# Altium PCB AltiumPCB.PcbDoc
Units mm, origin at the board's own origin, x right, y up, seen from the top; angles counter-clockwise.
Board outline 99 x 80 mm, 4 copper layers (Top Layer, Layer 1, Layer 2, Bottom Layer), stack 0.603 mm thick; 52 components, 31 nets, 184 pads, 0 vias.
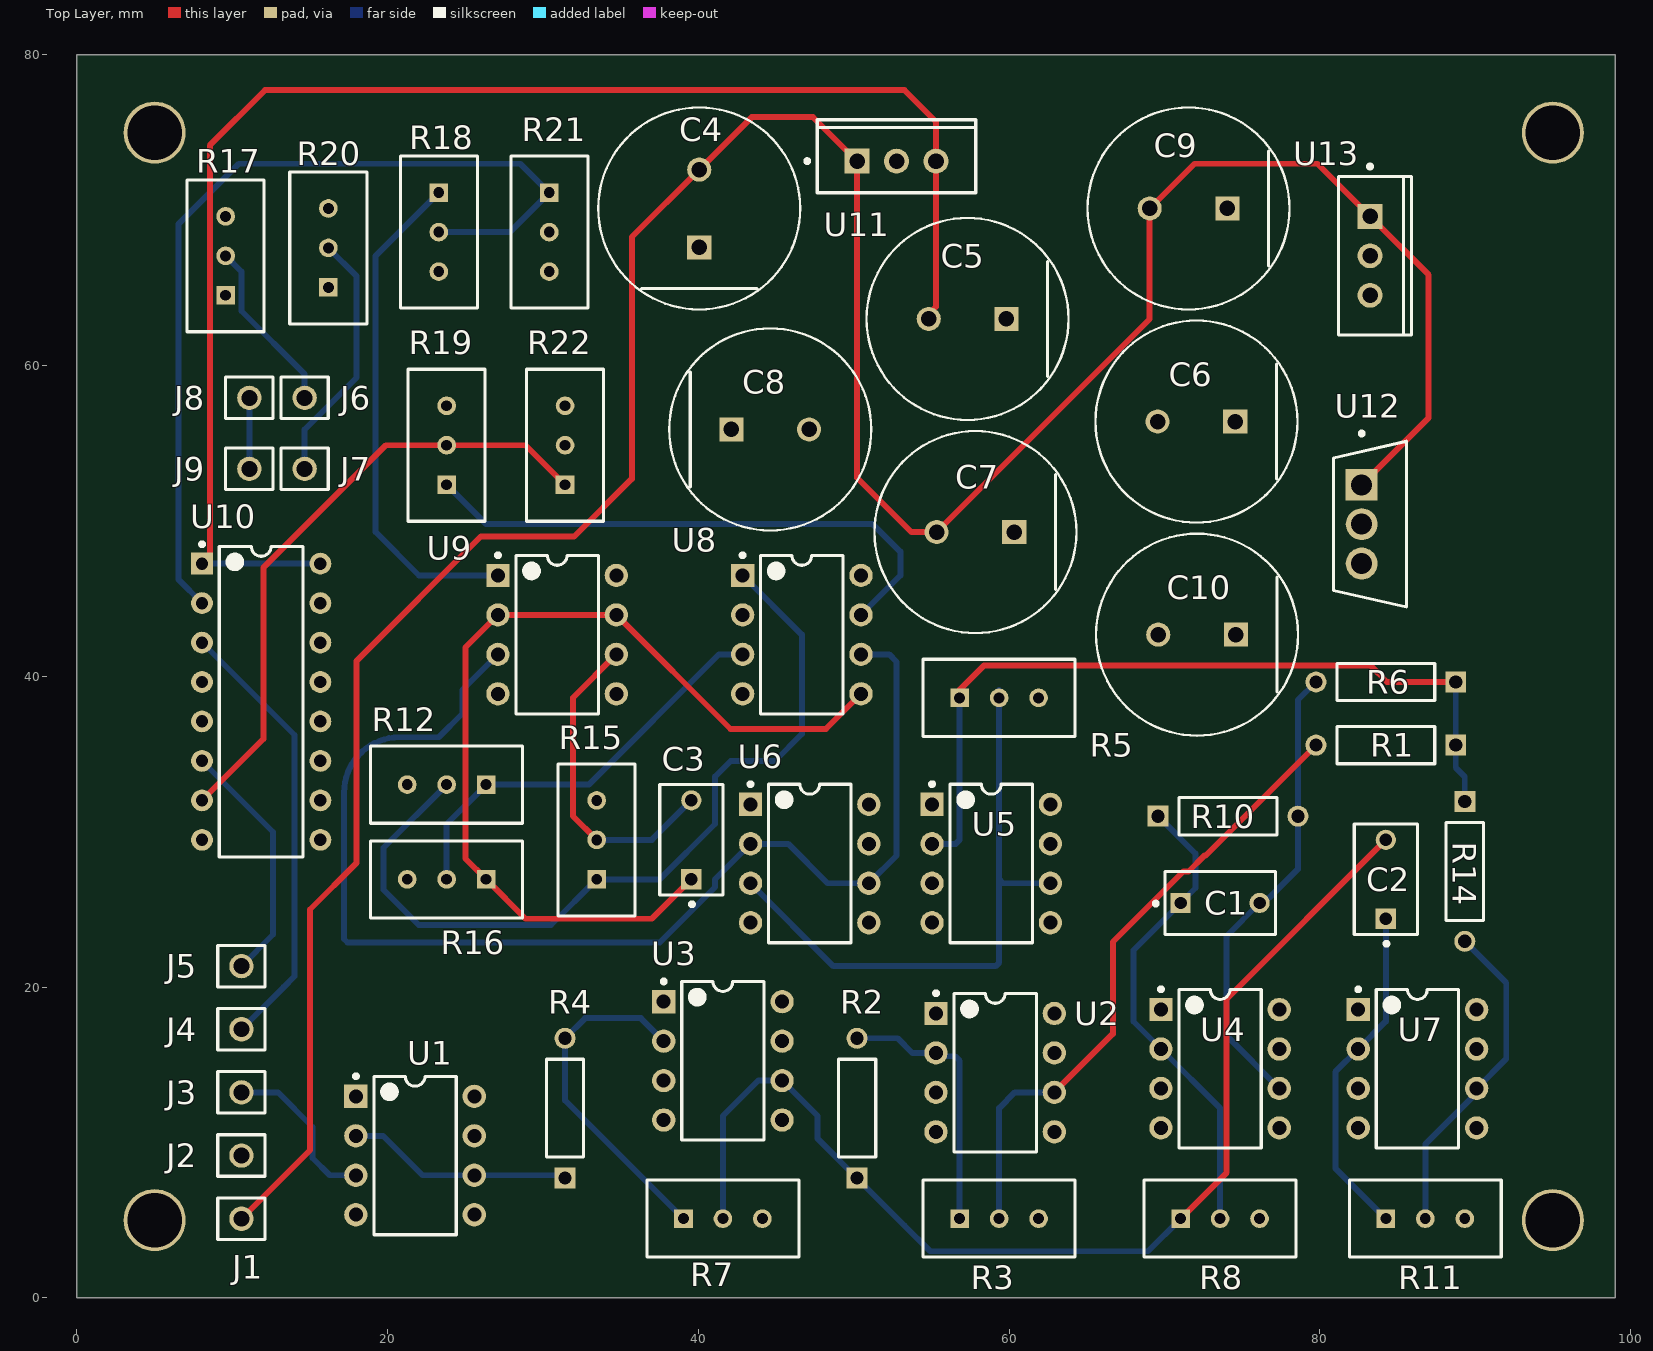
[diagram p0: Top Layer view]
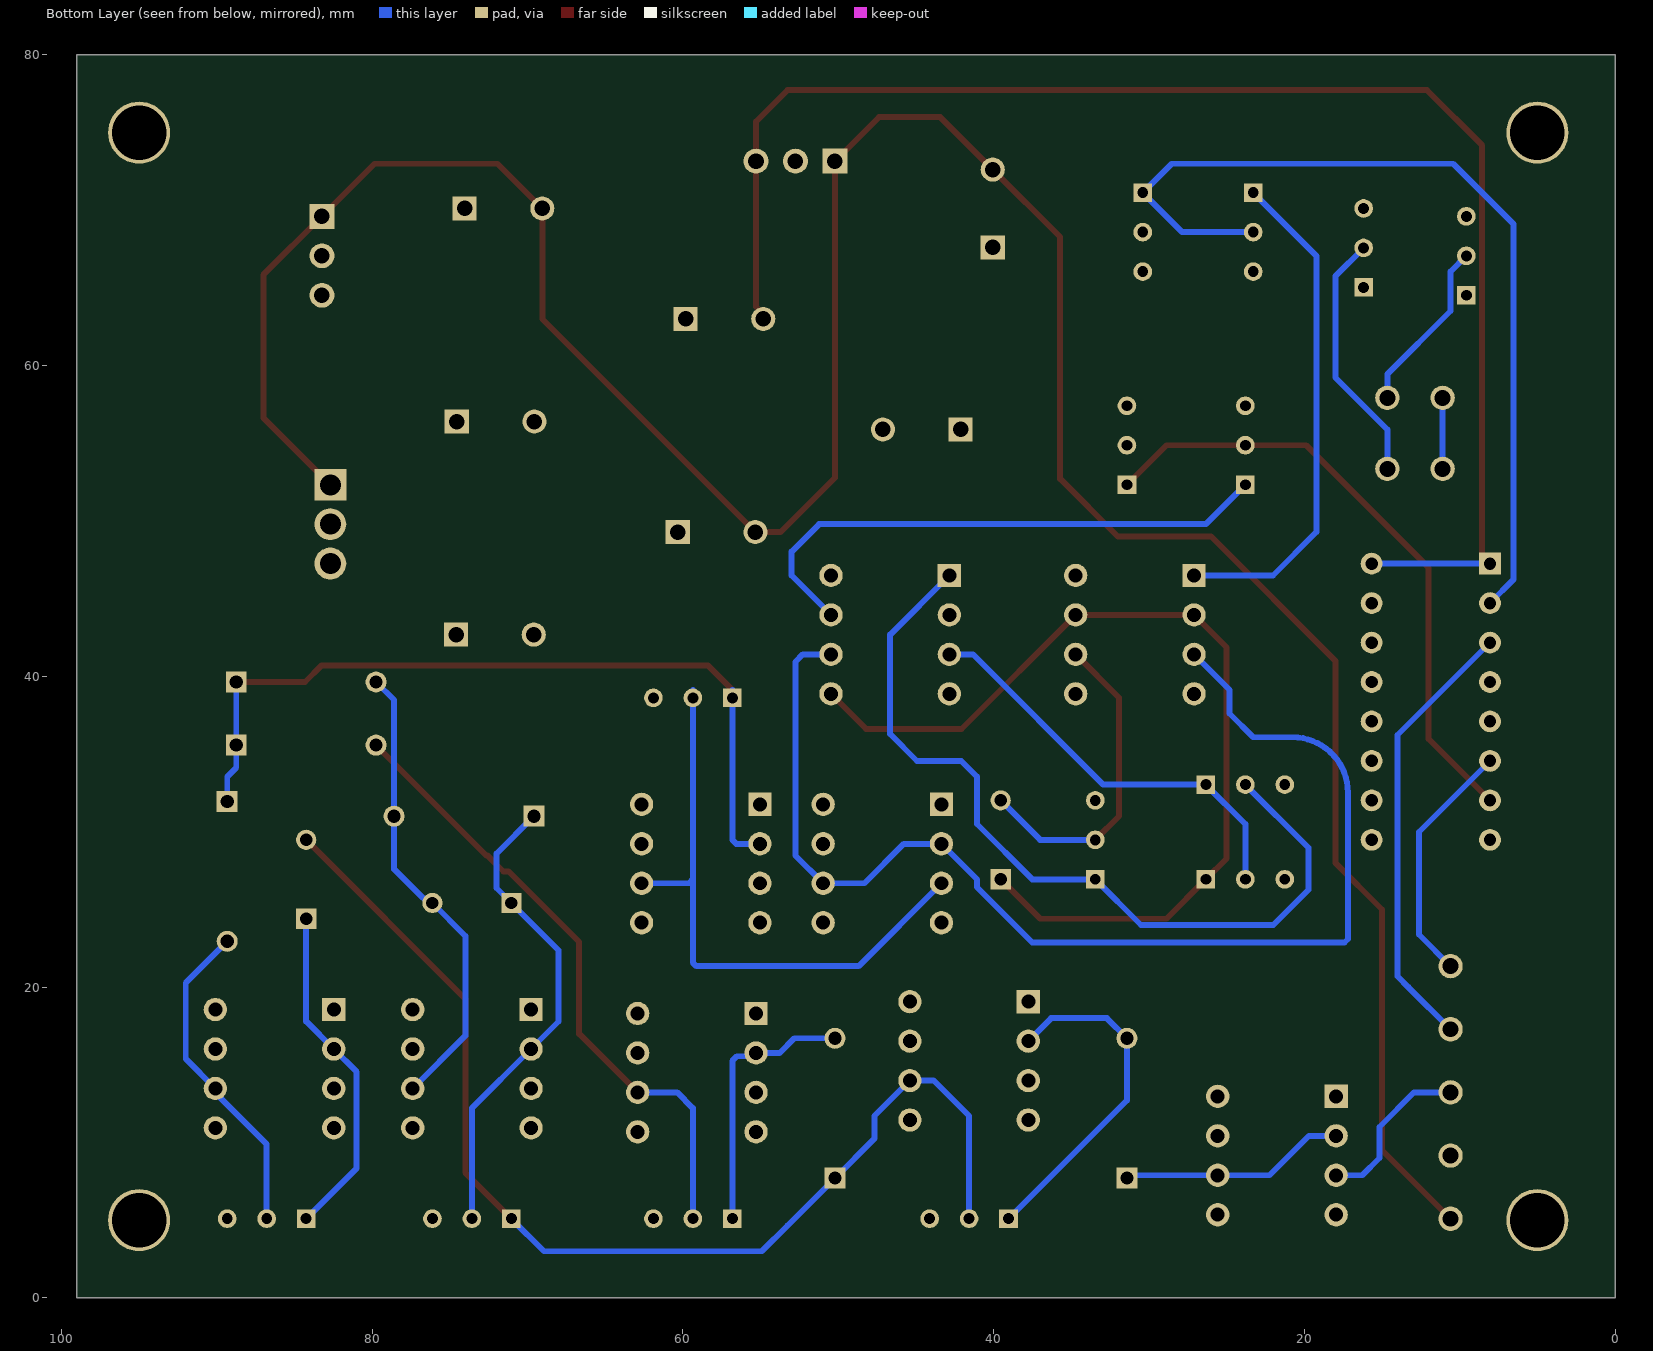
[diagram p1: Bottom Layer view, seen from below]
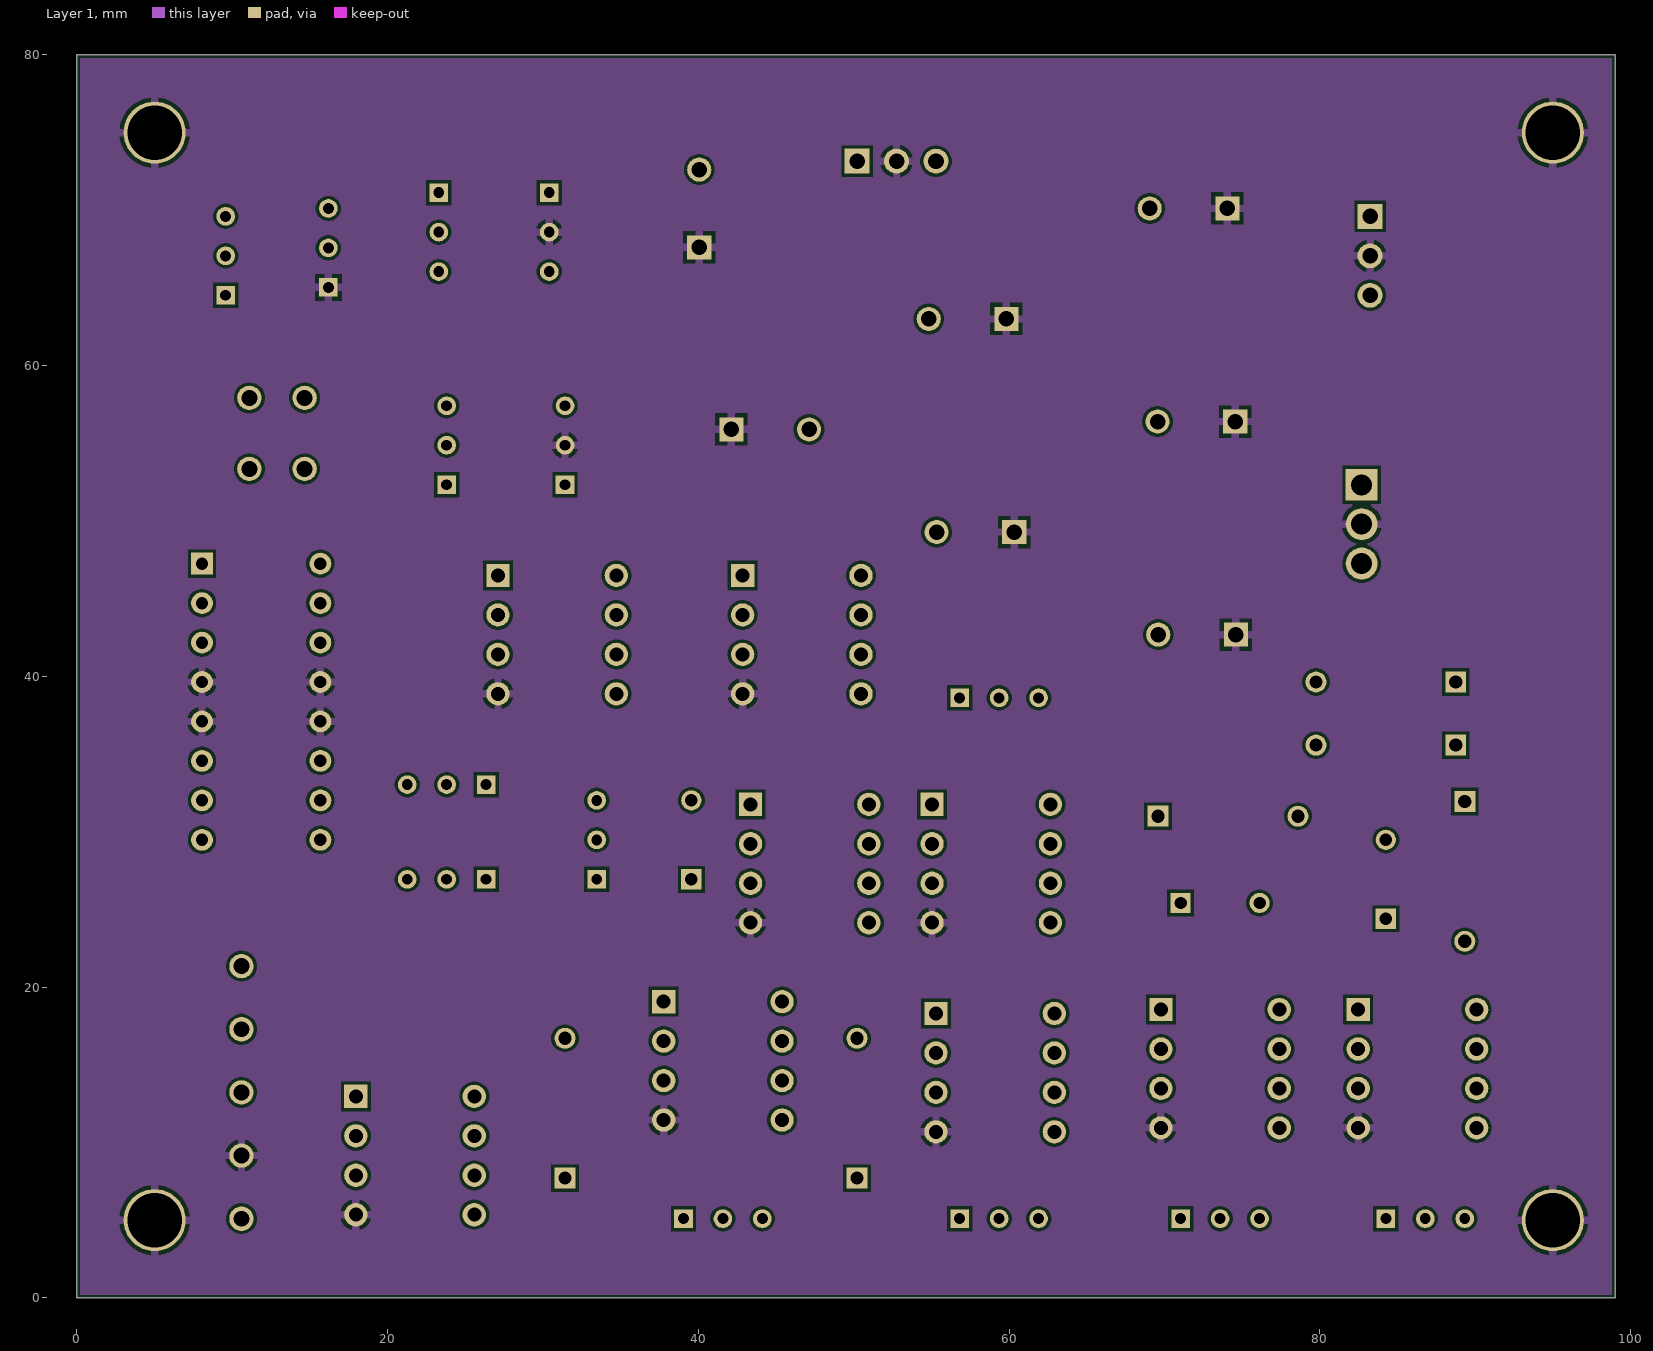
[diagram p2: Layer 1]
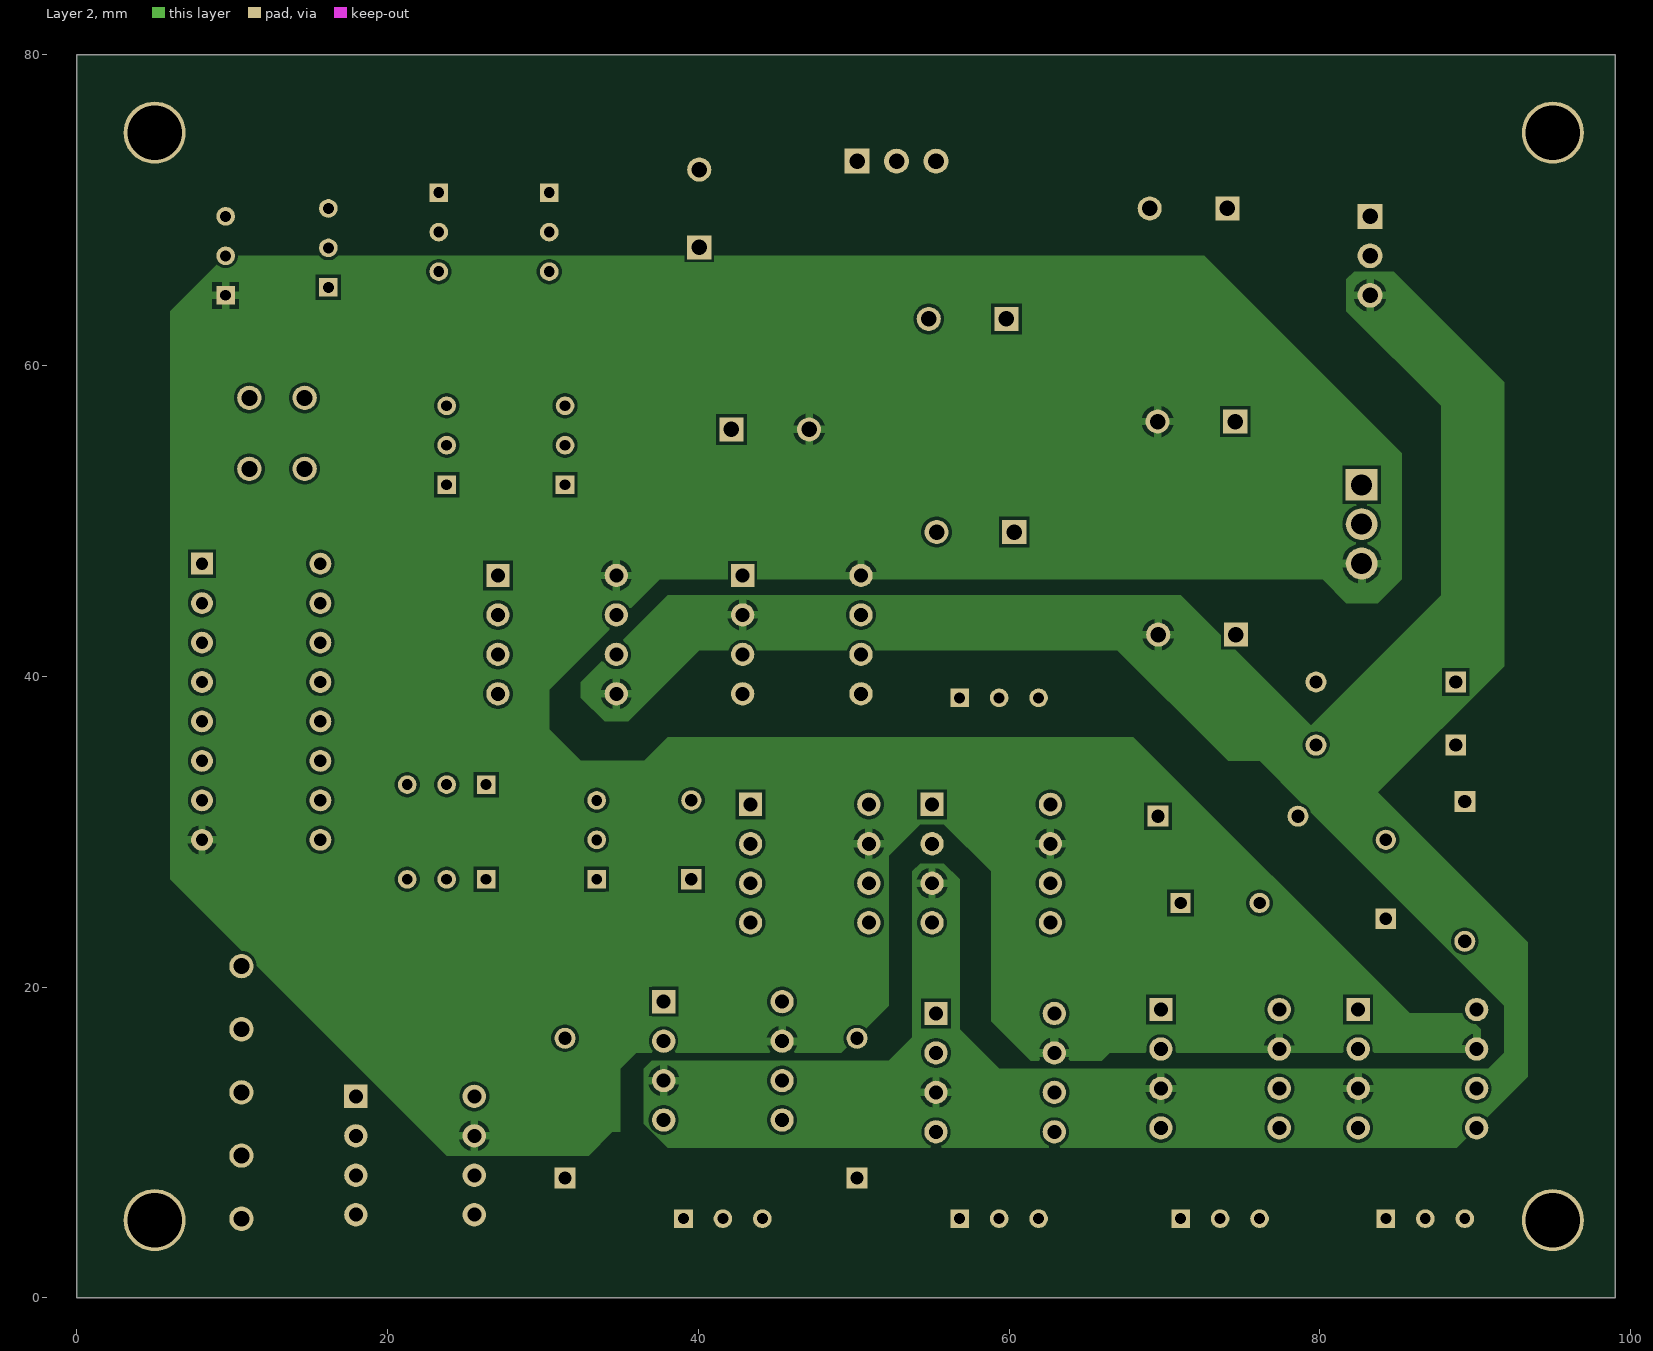
[diagram p3: Layer 2]
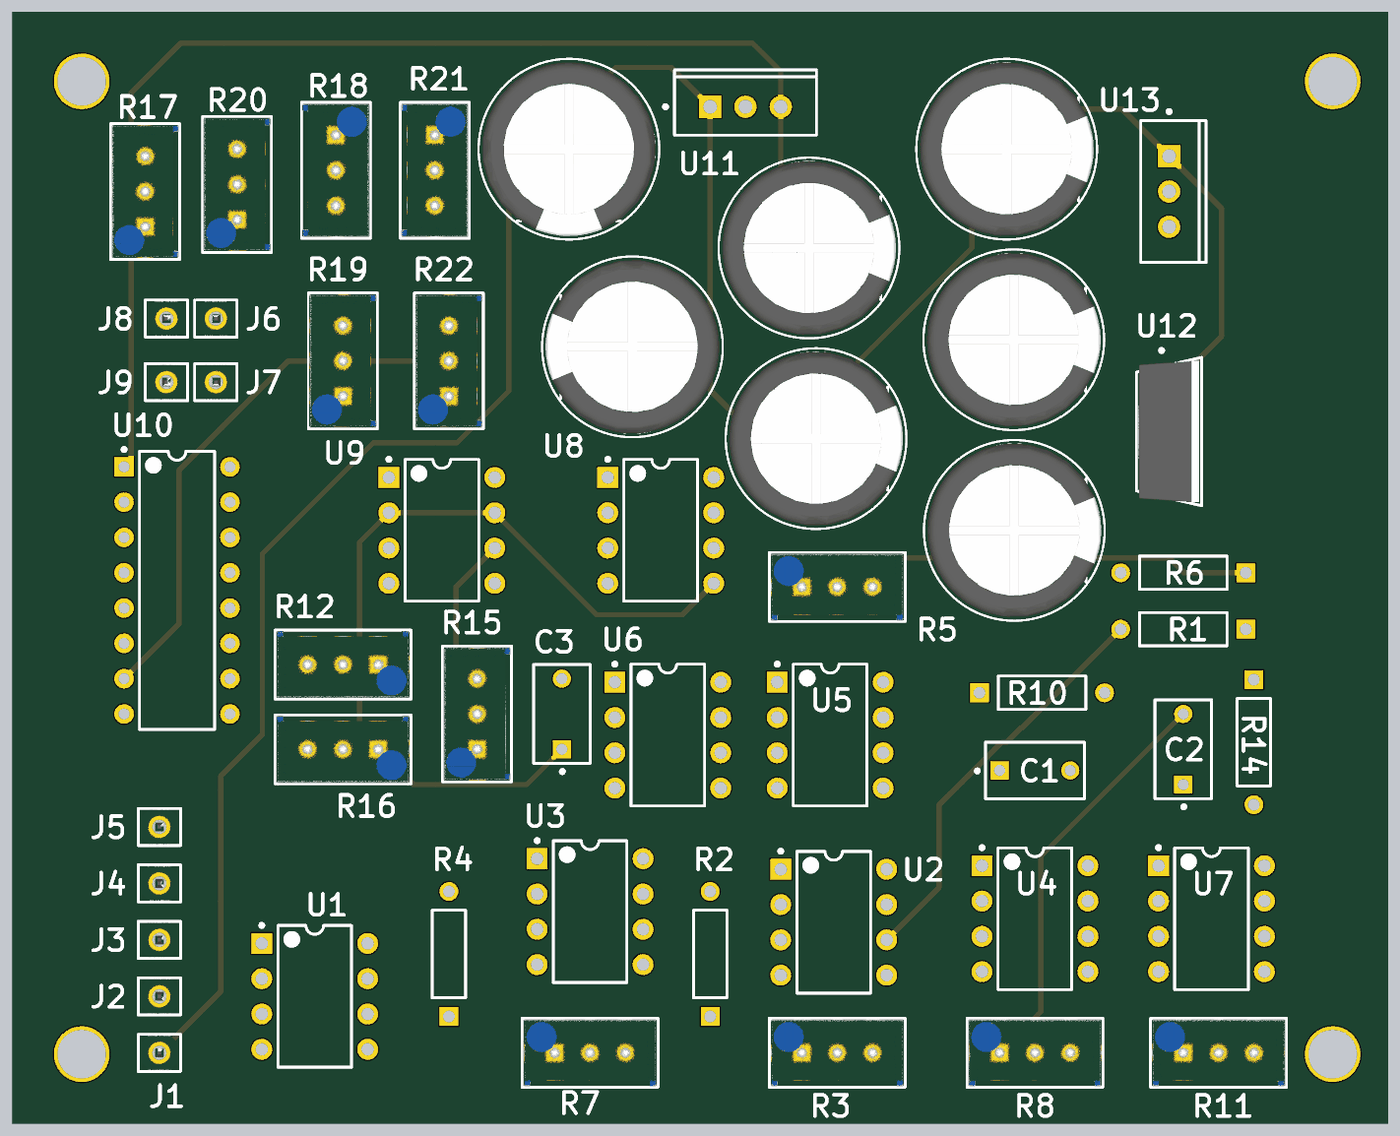
[diagram p4: 3D render of the assembled board from above, using the file's embedded part models]

## Layer stack, top to bottom
Top Solder: solder mask 0.0102, Solder Resist, Dk 3.5
Top Layer: signal copper 0.0356
Dielectric 2: prepreg 0.0711, PP-006, Dk 4.1
Layer 1: signal copper 0.035
Dielectric 1: dielectric 0.32, FR-4, Dk 4.8
Layer 2: signal copper 0.035
Dielectric 3: prepreg 0.0711, PP-006, Dk 4.1
Bottom Layer: signal copper 0.0356
Bottom Solder: solder mask 0.0102, Solder Resist, Dk 3.5

## Board outline
0,0 99,0 99,80 0,80

## Design rules (kind name [scope] priority, off if disabled: settings)
BoardOutlineClearance [All] p1: gap=0.2 ignorepadtopadclearanceinfootprint=FALSE except(0.4: Arc-SplitBarrior Arc-SplitContinuation Track-SplitBarrior Track-SplitContinuation SMDPad-SplitBarrior SMDPad-SplitContinuation THPad-SplitBarrior THPad-SplitContinuation Via-SplitBarrior Via-SplitContinuation Fill-SplitBarrior Fill-SplitContinuation Poly-SplitBarrior Poly-SplitContinuation Region-SplitBarrior Region-SplitContinuation Text-SplitBarrior Text-SplitContinuation)
Clearance "Clearance Bottom Layer" [OnLayer('Bottom Layer')] p1: gap=0.203 ignorepadtopadclearanceinfootprint=TRUE except(0.254: Arc-Text Track-Text SMDPad-Text THPad-Text Via-Text Fill-Text Poly-Text Region-Text Text-Text)
Clearance "Clearance Top Layer" [OnLayer('Top Layer')] p2: gap=0.203 ignorepadtopadclearanceinfootprint=TRUE except(0.254: Arc-Text Track-Text SMDPad-Text THPad-Text Via-Text Fill-Text Poly-Text Region-Text Text-Text)
Clearance [All] p3: gap=0.2 ignorepadtopadclearanceinfootprint=FALSE except(0.089: Arc-Arc Arc-Track Arc-SMDPad Track-Track Track-SMDPad SMDPad-SMDPad; 0.127: Arc-Via Track-Via SMDPad-Via THPad-Via Via-Via; 0.254: Arc-Text Track-Text SMDPad-Text THPad-Text Via-Text Fill-Text Poly-Text Region-Text Text-Text)
HoleSize [All] p1: absolutevalues=TRUE maxlimit=6.3 minlimit=0.2 maxpercent=80.000 minpercent=20.000
MinimumAnnularRing [All] p1: minimumring=0.076
MinimumSolderMaskSliver [All] p1: minsoldermaskwidth=0.1
PolygonConnect PolygonConnect_1 [All] p1: thpad.connectstyle=Relief thpad.reliefconductorwidth=0.508 thpad.reliefentries=4 thpad.polygonreliefangle="90 Angle" thpad.airgapwidth=0.254 smdpad.connectstyle=Relief smdpad.reliefconductorwidth=0.508 smdpad.reliefentries=4 smdpad.polygonreliefangle="90 Angle" smdpad.airgapwidth=0.254 via.connectstyle=Direct via.reliefconductorwidth=0.508 via.reliefentries=4 via.polygonreliefangle="90 Angle" via.airgapwidth=0.254
RoutingCorners [All] p1: cornerstyle=Round minsetback=2.54 maxsetback=2.54
RoutingVias [All] p1: holewidth=0.5 width=1 viastyle="Through Hole" minholewidth=0.2 minwidth=0.45 maxholewidth=1 maxwidth=2
SilkToSilkClearance [All] p1: silktosilkclearance=0.1
SilkToSolderMaskClearance [IsPad] p1: minsilkscreentomaskgap=0.1 clearancetoexposedcopper=TRUE
SolderMaskExpansion [All] p1: expansion=0.102 istentingtop=FALSE
Width [All] p1: maxlimit=2.54 minlimit=0.089 preferedwidth=0.381
25 further rules are at their usual default settings.

## Components (designator, comment, footprint, x,y, rotation, side; value= is the part's Value field where it differs from the comment)
C1 "C330C105M5U5TA" KEMT-C330C105M5U5TA 73.58,25.416 r0 top
C2 "C330C105M5U5TA" KEMT-C330C105M5U5TA 84.248,26.94 r90 top
C3 "C330C105M5U5TA" KEMT-C330C105M5U5TA 39.544,29.48 r90 top
C4 "EEUFK1C472L" FP-RAD-TH-D_12_5_0_5-L_40-MFG 40.052,70.12 r90 top
C5 "EEUFK1C472L" FP-RAD-TH-D_12_5_0_5-L_40-MFG 57.324,63.008 r180 top
C6 "EEUFK1C472L" FP-RAD-TH-D_12_5_0_5-L_40-MFG 72.056,56.404 r180 top
C7 "EEUFK1C472L" FP-RAD-TH-D_12_5_0_5-L_40-MFG 57.832,49.292 r180 top
C8 "EEUFK1C472L" FP-RAD-TH-D_12_5_0_5-L_40-MFG 44.624,55.896 r0 top
C9 "EEUFK1C472L" FP-RAD-TH-D_12_5_0_5-L_40-MFG 71.548,70.12 r180 top
C10 "EEUFK1C472L" FP-RAD-TH-D_12_5_0_5-L_40-MFG 72.096,42.688 r180 top
J1 "PBC01SAAN" FP-PBC01SAAN-MFG 10.588,5.096 r0 top
J2 "PBC01SAAN" FP-PBC01SAAN-MFG 10.588,9.16 r0 top
J3 "PBC01SAAN" FP-PBC01SAAN-MFG 10.588,13.224 r0 top
J4 "PBC01SAAN" FP-PBC01SAAN-MFG 10.588,17.288 r0 top
J5 "PBC01SAAN" FP-PBC01SAAN-MFG 10.588,21.352 r0 top
J6 "PBC01SAAN" FP-PBC01SAAN-MFG 14.652,57.928 r0 top
J7 "PBC01SAAN" FP-PBC01SAAN-MFG 14.652,53.356 r0 top
J8 "PBC01SAAN" FP-PBC01SAAN-MFG 11.096,57.928 r0 top
J9 "PBC01SAAN" FP-PBC01SAAN-MFG 11.096,53.356 r0 top
R1 "MFR-25FBF52-47K5" RESA60-630X240 84.248,35.576 r180 top
R2 "MFR-25FBF52-47K5" RESA60-630X240 50.212,12.208 r90 top
R3 "3296W-1-501LF" FP-3296W-MFG 59.356,5.101 r270 top
R4 "MFR-25FBF52-47K5" RESA60-630X240 31.416,12.208 r90 top
R5 "3296W-1-501LF" FP-3296W-MFG 59.356,38.624 r270 top
R6 "MFR-25FBF52-47K5" RESA60-630X240 84.248,39.64 r180 top
R7 "3296W-1-501LF" FP-3296W-MFG 41.576,5.101 r270 top
R8 "3296W-1-501LF" FP-3296W-MFG 73.58,5.101 r270 top
R10 "MFR-25FBF52-47K5" RESA60-630X240 74.088,31.004 r0 top
R11 "3296W-1-501LF" FP-3296W-MFG 86.788,5.101 r270 top
R12 "3296W-1-501LF" FP-3296W-MFG 23.796,33.031 r90 top
R14 "MFR-25FBF52-47K5" RESA60-630X240 89.328,27.448 r270 top
R15 "3296W-1-501LF" FP-3296W-MFG 33.448,29.48 r0 top
R16 "3296W-1-501LF" FP-3296W-MFG 23.796,26.935 r90 top
R17 "3296W-1-501LF" FP-3296W-MFG 9.567,67.072 r0 top
R18 "3296W-1-501LF" FP-3296W-MFG 23.293,68.596 r180 top
R19 "3296W-1-501LF" FP-3296W-MFG 23.791,54.88 r0 top
R20 "3296W-1-501LF" FP-3296W-MFG 16.176,67.58 r0 top
R21 "3296W-1-501LF" FP-3296W-MFG 30.405,68.596 r180 top
R22 "3296W-1-501LF" FP-3296W-MFG 31.411,54.88 r0 top
U1 "UA741CP" P0008A 21.764,9.16 r0 top
U2 "UA741CP" P0008A 59.102,14.494 r0 top
U3 "UA741CP" P0008A 41.576,15.256 r0 top
U4 "UA741CP" P0008A 73.58,14.748 r0 top
U5 "UA741CP" P0008A 58.848,27.956 r0 top
U6 "UA741CP" P0008A 47.164,27.956 r0 top
U7 "UA741CP" P0008A 86.28,14.748 r0 top
U8 "TL072CP" P0008A 46.656,42.688 r0 top
U9 "TL072CP" P0008A 30.908,42.688 r0 top
U10 "L293D" STM-L293D-16 11.858,38.37 r0 top
U11 "LM7805CT" FAIR-TO-220-3 52.752,73.168 r90 top
U12 "LM7812CT" FP-TO220B03-MFG 83.232,49.8 r0 top
U13 "LM7805CT" FAIR-TO-220-3 83.232,67.072 r0 top

## Footprints (in the part's own frame and the unit in brackets; to place one, negate y for a bottom-side part, rotate by r counter-clockwise, add the part's x,y. Pads: shape width x height; smd on the part's side, far side on the other; paste and mask are expansions set on the pad)
FAIR-TO-220-3 [mm] "FM, 3-Leads, Body 10.2x4.7mm, Pitch 2.54mm"
  rect 1.6x1.6 hole 1: 1(0,2.54)
  round 1.6 hole 1: 2(0,0) 3(0,-2.54)
  silkscreen extent -2.04,-5.1 2.66,5.87, body extent -2.04,-5.1 2.66,5.1, height 18.95
FP-3296W-MFG [mm]
  rect 1.2x1.2 hole 0.7 paste-1000 mask+0: 1(0.005,-2.54)
  round 1.2 hole 0.7 paste-1000 mask+0: 2(0.005,0) 3(0.005,2.54)
  silkscreen extent -2.48,-4.89 2.48,4.89, body extent -2.58,-4.99 2.58,4.99, height 0.25
FP-PBC01SAAN-MFG [mm]
  round 1.57 hole 1.02 paste-1000 mask+0: 1(0,0)
  silkscreen extent -1.53,-1.34 1.53,1.34, body extent -1.63,-1.44 1.63,1.44, height 0.25
FP-RAD-TH-D_12_5_0_5-L_40-MFG [mm]
  rect 1.55x1.55 hole 1 paste-1000 mask+0: 1(-2.5,0)
  round 1.55 hole 1 paste-1000 mask+0: 2(2.5,0)
  silkscreen extent -6.5,-6.5 6.5,6.5, body extent -6.6,-6.6 6.6,6.6, height 0.25
FP-TO220B03-MFG [mm]
  rect 2.05x2.05 hole 1.35 paste-1000 mask+0: 1(-0.54,2.535)
  round 2.05 hole 1.35 paste-1000 mask+0: 2(-0.54,0) 3(-0.54,-2.535)
  silkscreen extent -2.35,-5.34 2.35,5.96, body extent -2.45,-5.44 2.45,5.44, height 0.25
KEMT-C330C105M5U5TA [mm] "THD, 2-Leads, Body 7.11x4.07mm"
  rect 1.3x1.3 hole 0.8: 1(-2.54,0)
  round 1.3 hole 0.8: 2(2.54,0)
  silkscreen extent -4.27,-2.03 3.55,2.03, body extent -3.55,-2.03 3.55,2.03, height 9.14
P0008A [mm] "DIP, 8-Leads, Body 10.15x6.6mm, Pitch 2.54mm"
  rect 1.5x1.5 hole 0.9: 1(-3.81,3.81)
  round 1.5 hole 0.9: 2(-3.81,1.27) 3(-3.81,-1.27) 4(-3.81,-3.81) 5(3.81,-3.81) 6(3.81,-1.27) 7(3.81,1.27) 8(3.81,3.81)
  silkscreen extent -3.93,-5.1 2.65,5.23, body extent -3.95,-5.07 3.95,5.07, height 5.08
RESA60-630X240 [mm] "Axial Resistor, 2-Leads, Dia 2.4mm, Body Length 6.3mm"
  rect 1.35x1.35 hole 0.85: 1(-4.5,0)
  round 1.35 hole 0.85: 2(4.5,0)
  silkscreen extent -3.15,-1.2 3.15,1.2, body extent -3.15,-1.2 3.15,1.2, height 2.4
STM-L293D-16 [mm] "DIP, 16-Leads, Body 20x6.85mm, Pitch 2.54mm"
  rect 1.4x1.4 hole 0.8: 1(-3.81,8.89)
  round 1.4 hole 0.8: 2(-3.81,6.35) 3(-3.81,3.81) 4(-3.81,1.27) 5(-3.81,-1.27) 6(-3.81,-3.81) 7(-3.81,-6.35) 8(-3.81,-8.89) 9(3.81,-8.89) 10(3.81,-6.35) 11(3.81,-3.81) 12(3.81,-1.27) 13(3.81,1.27) 14(3.81,3.81) 15(3.81,6.35) 16(3.81,8.89)
  silkscreen extent -3.93,-10 2.7,10.26, body extent -3.93,-10 3.93,10, height 5.1

## Part data
C1 C2 C3: library part CMP-2000-06056-1, "Ceramic Capacitor, 1 uF, +/- 20%, 50 V, -10 to 85 degC, 2-Pin THD, RoHS, Bulk", Capacitance=1µF, Manufacturer=Kemet, Operating Temperature=10°C~85°C, Package / Case=Radial, Package Description="2-Pin Through Hole Device, Body 7.11 x 4.07 mm", Ratings=-, Standard Package=250, Temperature Coefficient=Z5U, Tolerance=±20%, Voltage - Rated=50V, Applications=GeneralPurpose, Catalog Drawings=C330(std), Category=Capacitors, Datasheet URL=http://www.kemet.com/Lists/ProductCatalog/Attachments/599/KEM_C1051_GOLDMAX_Z5U.pdf, Datasheet Version=12/2015, Family=CeramicCapacitors, Features=-, Height - Seated (Max)="0.360\"(9.14mm)", Lead Spacing="0.200\"(5.08mm)", Lead Style=Straight, Manufacturer URL=http://www.kemet.com/, Mounting Technology=ThroughHole, Mounting Type=ThroughHole, Online Catalog=GoldenMax™Series, Other Names=399-4390, Package Reference=C330C105M5U5TA, Packaging=Bulk, PCN Design/Specification=C3yySeriesGoldenMaxLeadConfiguration02/Feb/2015, Product Training Modules=CapacitorBasics-TypicalUsesforCapacitors, Series=GoldenMax™, Size / Dimension="0.300\"Lx0.150\"W(7.62mmx3.81mm)", Thickness (Max)=-
C4 C5 C6 C7 C8 C9 C10: library part CMP-05427-001252-1, "Aluminum Electrolytic Capacitors (Radial Lead Type) AEC-Q200 Qualified 4700uF ±20% 16V", Capacitance=4.7mF, Case/Package=Radial, Dielectric Material=Aluminium, Max Operating Temperature=105°C, Min Operating Temperature=-55°C, Ripple Current=3.01A, Tolerance=20%, Voltage=16V, Construction=RADIAL, Diameter=12.5mm, Height=40mm, Impedance=14mR, Lead Diameter=0.8mm, Lead Pitch=5mm, Life (Hours)=5000Hour, Mount="Through Hole", Number of Pins=2, Packaging=Bulk, Radiation Hardening=No, REACH SVHC="No SVHC", RoHS Compliant=Yes, Series="FK Radial", Termination=Radial, Voltage Rating=16V, Voltage Rating (DC)=16V
J1 J2 J3 J4 J5 J6 J7 J8 J9: library part CMP-25680-000032-1, "CONN HEADER VERT 1POS", Color=Black, Package Quantity=1, Connector Type="Male Pin", Contact Material=Bronze, Contact Mating Length=0.23inch, Contact Plating=Gold, Gender=Male, Height=2.54mm, Housing Color=Black, Housing Material=Plastic, Lead Free="Lead Free", Length=2.54mm, Mount="Through Hole", Number of Contacts=1, Number of Positions=1, Number of Rows=1, Packaging=Bulk, Pitch=2.54mm, Termination=Solder, Width=2.54mm
R1 R2 R4 R6 R10 R14: library part CMP-1659-00063-1, "Axial Resistor, 47.5 KOhm, +/- 1%, 0.25 W, -55 to 155 degC, 2-Pin THD, RoHS, Bulk", Case Code (Metric)=2520, Case\Package=1008, Current Rating="1.3 A", Max Operating Temperature="125 degC", Min Operating Temperature="-55 degC", Package Quantity=3000, Tolerance=20%, ComponentLink1Description="Manufacturer URL", ComponentLink1URL=http://www.yageo.com/, ComponentLink2Description=Datasheet, ComponentLink2URL=http://www.yageo.com/documents/recent/Yageo%20LR_MFR_2013.pdf, DatasheetVersion=Apr-13, Height="1.2 mm", Length="2.5 mm", Mount="Surface Mount", PackageDescription="2-Pin Axial Lead, Dia 2.4 mm, Body Length 6.3 mm", PackageReference=MFR-25, Packaging="Tape and Reel", Radiation Hardening=No, RoHSCompliant=true, Shielding=Shielded, Width="2 mm"
R3 R5 R7 R8 R11 R12 R15 R16 R17 R18 R19 R20 R21 R22: library part CMP-07234-000046-1, "TRIMMER 500 OHM 0.5W PC PIN TOP", Color=Blue, Max Operating Temperature=125°C, Max Power Dissipation=500mW, Min Operating Temperature=-55°C, Package Quantity=50, Resistance=500R, Resistance Tolerance=10%, Resistor Type=Cermet, Temperature Coefficient=100ppm/°C, Contact Plating=Tin, Depth=4.83mm, Height=0.395inch, Lead Free="Lead Free", Length=9.53mm, Military Standard=Not, Mount="Through Hole", Number of Turns=25, Packaging=Rail/Tube, Power Rating=500mW, Radiation Hardening=No, REACH SVHC="No SVHC", RoHS Compliant=Yes, Series=3296, Taper=Linear, Technology=CERMET, Termination=Pin, Tolerance=10%, Weight=0.03oz, Width=9.53mm
U1 U2 U3 U4 U5 U6 U7: library part CMP-0017-00973-2, "General-Purpose Operational Amplifier, 7 to 36 V, 0 to 70 degC, 8-pin DIP (P8), Pb-Free (RoHS)", Manufacturer="Texas Instruments", Total Supply Voltage(Max)(+5V is 5, +/-5V is 10)=36, Total Supply Voltage(Min)(+5V is 5, +/-5V is 10)=7, CMRR(Min)(dB)=70, Code_JEDEC=MS-001, ComponentLink1Description="Manufacturer URL", ComponentLink1URL=http://www.ti.com/, ComponentLink2Description=Datasheet, ComponentLink2URL=http://www.ti.com/lit/ds/symlink/ua741.pdf, ComponentLink3Description="Package Specification", ComponentLink3URL=http://www.ti.com/litv/pdf/mpdi001b, DatasheetVersion=SLOS094B, Eco-Plan="Pb-Free (RoHS)", GBW(Typ)(MHz)=1, IIB(Max)(pA)=800000, Iq per channel(Max)(mA)=2.8, Mounting Technology="Through Hole", Number of Channels=1, PackageDescription="8-Pin Plastic In-Line, Body 9.59 x 6.35 mm, Pitch 2.54 mm", PackageReference=P0008A, PackageVersion="4040082/E, 04/2010", PartNumber=UA741CP, Slew Rate(Typ)(V/us)=0.5, Sub Family="General Purpose Amplifier, High Supply Voltage Amplifier (>=30V)", Vio (25C)(Max)(mV)=6
U8 U9: library part CMP-0017-00950-2, "Dual Low-Noise JFET-Input General-Purpose Operational Amplifier, 7 to 36 V, 0 to 70 degC, 8-pin DIP (P8), Pb-Free (RoHS)", Manufacturer="Texas Instruments", Rating=Catalog, Total Supply Voltage(Max)(+5V is 5, +/-5V is 10)=36, Total Supply Voltage(Min)(+5V is 5, +/-5V is 10)=7, CMRR(Min)(dB)=70, Code_JEDEC=MS-001, ComponentLink1Description="Manufacturer URL", ComponentLink1URL=http://www.ti.com/, ComponentLink2Description=Datasheet, ComponentLink2URL=http://www.ti.com/lit/ds/symlink/tl072.pdf, ComponentLink3Description="Package Specification", ComponentLink3URL=http://www.ti.com/litv/pdf/mpdi001b, DatasheetVersion=SLOS080J, Eco-Plan="Pb-Free (RoHS)", GBW(Typ)(MHz)=3, IIB(Max)(pA)=200, Iq per channel(Max)(mA)=2.5, Mounting Technology="Through Hole", Number of Channels=2, Offset Drift(Typ)(uV/C)=18, PackageDescription="8-Pin Plastic In-Line, Body 9.59 x 6.35 mm, Pitch 2.54 mm", PackageReference=P0008A, PackageVersion="4040082/E, 04/2010", PartNumber=TL072CP, Slew Rate(Typ)(V/us)=13, Sub Family="General Purpose Amplifier, High Supply Voltage Amplifier (>=30V)", Vio (25C)(Max)(mV)=10, Vn at 1kHz(Typ)(nV/rtHz)=18
U10: library part CMP-2000-06524-1, "Push-Pull Four Channel Driver with Diode, 4.5 to 36 V, -40 to 150 degC, 16-Pin PDIP, RoHS, Tube", Current - Output / Channel=600mA, Current - Peak Output=1.2A, Manufacturer=STMicroelectronics, On-State Resistance=-, Operating Temperature=-40°C~150°C, Package / Case="16-DIP(0.300\",7.62mm)", Package Description="16-Pin Thru-Hole Dual-In-Line, Body 20 x 6.85 mm, Pitch 2.54 mm", Package Reference=DIP-16, Standard Package=25, Supplier Device Package=16-PowerDIP, Voltage - Supply=4.5V~36V, Category=IntegratedCircuits(ICs), Datasheet URL=http://www.st.com/st-web-ui/static/active/en/resource/technical/document/datasheet/CD00000059.pdf, Datasheet Version=07/2003, Dynamic Catalog=HalfBridge, Family=PMIC-MOSFET,BridgeDrivers-InternalSwitch, Input Type=Non-Inverting, Manufacturer URL=http://www.st.com/, Mounting Technology=ThroughHole, Mounting Type=ThroughHole, Number of Outputs=4, Other Names=497-2936-5, Other Related Documents=L293DViewAllSpecifications, Packaging=Tube, PartNumber=L293D, Series=-, Type=HalfBridge
U11 U13: library part CMP-2000-04938-1, "Positive Voltage Regulator, 5 V, 1 A, -40 to 125 degC, 3-Pin TO-220, RoHS, Tube", Manufacturer=FairchildSemiconductor, Maximum Input Voltage=35V, Maximum Output Current=2.2(Typ)A, Maximum Quiescent Current=8mA, Operating Temperature=-40to125degC, Output Voltage=5V, Package=3TO-220AB, Package Description="3-Pin Through Hole Device, Body 10 x 4.5 mm, Pitch 2.54 mm", Package Reference=TO-220, Typical Dropout Voltage @ Current=2@1AV, Accuracy=±4%, Category=LinearRegulator, Datasheet URL=https://datasheet.ciiva.com/26904/lm7805ct-26904988.pdf, Datasheet Version=Aug-12, Line Regulation=100mV, Load Regulation=100mV, Manufacturer URL=https://www.fairchildsemi.com/, Mounting=ThroughHole, Number of Outputs=1, Output Type=Fixed, Package URL=https://www.fairchildsemi.com/package-drawings/TO/TO220B03.pdf, Packaging=Rail/Tube, Polarity=Positive, Rad Hard=No, Type=Linear
U12: library part CMP-07128-000015-1, "IC REG LINEAR 12V 1A TO220-3", Dropout Voltage=2V, Manufacturer="ON Semiconductor", Max Supply Voltage=35V, Nominal Supply Current=5.1mA, Output Current=1A, Output Voltage=12V, Package=TO220B03, Temperature="-40°C to +125°C", Temperature Range High=+125°C, Temperature Range Low=-40°C, Accuracy Percentage=4%, Automotive=No, Category=IC, ComponentLink2Description=Datasheet, ComponentLink2URL=https://www.mouser.in/datasheet/2/308/LM7812-1125088.pdf, Device Class L1="Integrated Circuits (ICs)", Device Class L2="Power Management ICs", Device Class L3="Voltage Regulators - Linear", Digikey Description="IC REG LINEAR 12V 1A TO220-3", Height=20.4mm, Ipc Land Pattern Name=TO-220, Lead Free=Yes, Manufacturer Part Number=LM7812CT, Number of Outputs=1, Obsolete Part=true, Octopart=https://octopart.com/lm7812ct-on+semiconductor-14383031, Output Type=Fixed, RoHS=TRUE, Standoff Height=2.7mm

## Free pads (board coordinates)
  round 4 hole 3.5: 2(95,75) 3(5,5) 4(5,75) 5(95,5)

## Nets (pads, with @x,y where several pads share a name; then routed paths per layer and width w, separated by ;. In a path a pad name is that pad's centre, name@x,y a point inside that pad or via, vN(x,y) a via of type N, cw(c..) or ccw(c..) an arc to the next point about the centre after c; other vN are vias at no path point)
5V: C5.2 U10.1 U10.16 U11.3 | length 96.7
  Top Layer w0.381: U10.1 8.556,47.768 8.556,74.184 12.112,77.74 53.26,77.74 55.292,75.708 U11.3 55.292,63.792 54.824,63.324 C5.2
  Bottom Layer w0.381: U10.1 U10.16
6V: C10.2 U2.3 U3.3 U4.3 U5.3 U7.3 U8.2 U9.5 U13.3
12V: C6.2 C8.2 R17.1 U1.7 U2.7 U3.7 U4.7 U5.7 U6.7 U7.7 U8.8 U9.8 U10.8 U12.3 | length 0.3
  Layer 1 w0.381: U8.8 U8.8@50.68,46.284
12Vs: C4.2 C7.2 C9.2 J1.1 U11.1 U12.1 U13.1 | length 186.8
  Top Layer w0.381: J1.1 15,9.508 15,25 18,28 18,41 26,49 32,49 35.717,52.717 35.717,68.285 C4.2 43.432,76 47.38,76 U11.1 50.212,52.788 53.708,49.292 C7.2 69.048,63.008 C9.2 71.928,73 79.844,73 U13.1 87,65.844 87,56.643 U12.1
GND: C4.1 C5.1 C6.1 C7.1 C8.1 C9.1 C10.1 J2.1 pad.2 pad.3 pad.4 pad.5 R20.1 R21.2 R22.2 U1.4 U2.4 U3.4 U4.4 U5.4 U6.4 U7.4 U8.4 U9.4 U10.4 U10.5 U10.12 U10.13 U11.2 U12.2 U13.2 | length 0.3
  Top Layer w0.381: U11.2@52.434,73.168 U11.2
INPUT1: R18.2 R21.1 U10.2 | length 59.4
  Bottom Layer w0.381: U10.2 6.524,46.244 6.524,69.104 10.42,73 28.536,73 R21.1 27.86,68.596 R18.2
INPUT2: R19.2 R22.1 U10.7 | length 40.3
  Top Layer w0.381: U10.7 12,35.972 12,47 19.88,54.88 R19.2 28.876,54.88 R22.1
NetC1_1: C1.1 R8.2 R10.1 U4.2 | length 30.9
  Bottom Layer w0.381: R10.1 72,28.592 72,26.376 C1.1 68,22.376 68,17.788 U4.2 73.58,12.208 R8.2
NetC1_2: C1.2 R6.2 R10.2 U4.6 | length 30.1
  Bottom Layer w0.381: U4.6 74,16.868 74,23.296 C1.2 76.369,25.416 76.703,25.751 76.751,25.751 78.588,27.588 R10.2 78.588,38.48 R6.2
NetC2_1: C2.1 R11.1 U7.2 | length 22
  Bottom Layer w0.381: R11.1 81,8.344 81,14.548 U7.2 84.248,17.796 C2.1
NetC2_2: C2.2 R2.1 R7.2 R8.1 U3.6 | length 73.1
  Top Layer w0.381: R8.1 74,8.056 74,19.232 C2.2
  Bottom Layer w0.381: R7.2 41.576,11.7 43.862,13.986 U3.6 47.672,11.7 47.672,10.248 R2.1 53.26,4.66 54.92,3 68.944,3 R8.1
NetC3_1: C3.1 R16.1 U8.5 U9.2 U9.7 | length 61.1
  Top Layer w0.381: C3.1 37.004,24.4 28.876,24.4 R16.1 25,28.276 25,41.86 U9.2 U9.7 42.062,36.614 48.202,36.614 U8.5
NetC3_2: C3.2 R15.2 U9.6 | length 20.9
  Top Layer w0.381: R15.2@33.448,29.48 31.924,31.004 31.924,38.624 U9.6
  Bottom Layer w0.381: R15.2@33.448,29.48 37.004,29.48 C3.2
NetJ3_1: J3.1 U1.3 | length 10.7
  Bottom Layer w0.381: J3.1 12.936,13.224 15.16,11 15.16,9 16.27,7.89 U1.3
NetJ4_1: J4.1 U10.3 | length 28.8
  Bottom Layer w0.381: U10.3 14,36.228 14,20.7 13.3,20 J4.1
NetJ5_1: J5.1 U10.6 | length 15.9
  Bottom Layer w0.381: U10.6 12.62,29.988 12.62,23.384 J5.1
NetJ6_1: J6.1 R17.2 | length 11.2
  Bottom Layer w0.381: R17.2 10.588,66.056 10.588,63.516 14.652,59.452 J6.1
NetJ7_1: J7.1 R20.2 | length 16.4
  Bottom Layer w0.381: J7.1 14.652,55.896 18,59.244 18,65.756 16.181,67.575 R20.2
NetJ8_1: J8.1 J9.1 | length 4.6
  Bottom Layer w0.381: J9.1 J8.1
NetR1_1: R1.1 R5.1 R6.1 R14.1 U5.2 | length 52.5
  Top Layer w0.381: R5.1@56.816,39.132 58.393,40.709 83.25,40.709 84.319,39.64 R6.1
  Bottom Layer w0.381: U5.2 56.562,29.226 56.816,29.48 R5.1@56.816,39.132 ; R6.1 R1.1 88.748,34.124 89.328,33.544 R14.1
NetR1_2: R1.2 R3.2 U2.6 | length 40.7
  Top Layer w0.381: U2.6 66.677,16.989 66.677,22.909 71.215,27.448 71.548,27.448 72.564,28.464 72.636,28.464 R1.2
  Bottom Layer w0.381: R3.2 59.356,12.208 60.372,13.224 U2.6
NetR2_2: R2.2 R3.1 U2.2 | length 17.4
  Bottom Layer w0.381: R2.2 52.824,16.708 53.768,15.764 U2.2 55.506,15.55 56.522,15.55 56.816,15.256 R3.1
NetR4_1: R4.1 U1.2 U1.6 | length 14.6
  Bottom Layer w0.381: U1.2 19.701,10.43 22.241,7.89 31.234,7.89 R4.1
NetR4_2: R4.2 R7.1 U3.2 | length 22.3
  Bottom Layer w0.381: U3.2 36.292,18 32.708,18 R4.2 31.416,12.716 R7.1
NetR5_2: R5.2 U5.6 U6.3 | length 39.3
  Bottom Layer w0.381: U6.3 48.688,21.352 59.133,21.352 59.356,21.575 59.356,26.94 ; R5.2@59.356,39.132 59.356,26.94 ; U5.6 59.61,26.686 59.356,26.94
NetR11_2: R11.2 R14.2 U7.6 | length 21.1
  Bottom Layer w0.381: R11.2 86.788,9.891 90.09,13.193 U7.6 92,15.388 92,20.276 R14.2
NetR12_1: R12.1 R16.2 U8.3 | length 27.1
  Bottom Layer w0.381: R16.2 23.796,30.496 R12.1 32.94,33.036 41.322,41.418 U8.3
NetR12_2: R12.2 R15.1 U8.1 | length 55
  Bottom Layer w0.381: R12.2 19.732,28.972 19.732,26.268 22,24 30.508,24 R15.1@33.448,26.94 ; R15.1 37.512,26.94 41.068,30.496 41.068,33.544 42.084,34.56 44.927,34.56 46.656,36.289 46.656,42.688 U8.1
NetU6_2: U6.2 U6.6 U8.6 U9.3 | length 79.8
  Bottom Layer w0.381: U9.3 24.812,39.132 24.812,37.608 23.288,36.084 20.751,36.084 ccw(c20.751,32.525) 17.192,32.525 17.192,23.099 17.415,22.876 37.512,22.876 41.068,26.432 41.068,26.94 U6.2 45.774,29.226 48.314,26.686 U6.6 52.752,28.464 52.752,40.941 52.275,41.418 U8.6
PWM: R18.1 U9.1 | length 32.6
  Bottom Layer w0.381: R18.1 19.224,67.072 19.224,49.292 22.018,46.498 U9.1
~PWM: R19.1 U8.7 | length 36.1
  Bottom Layer w0.381: R19.1 26.336,49.8 51.228,49.8 53,48.028 53,46.492 U8.7
pads on no net: R3.3 R5.3 R7.3 R8.3 R11.3 R12.3 R15.3 R16.3 R17.3 R18.3 R19.3 R20.3 R21.3 R22.3 U1.1 U1.5 U1.8 U2.1 U2.5 U2.8 U3.1 U3.5 U3.8 U4.1 U4.5 U4.8 U5.1 U5.5 U5.8 U6.1 U6.5 U6.8 U7.1 U7.5 U7.8 U10.9 U10.10 U10.11 U10.14 U10.15

## Polygon pours and split planes (outlines as drawn)
12V on Layer 2 "12V_L03_P028" (solid, pour order 28): 85.264,46.471 85.264,46.244 83.74,44.72 81.708,44.72 80.184,46.244 80.184,48.276
12V on Layer 2 "12V_L03_P034" (solid, pour order 34): 60.88,16.78 60.88,15.764 61.388,15.256 65.96,15.256 67.992,17.288 67.992,17.796
12V on Layer 2 "12V_L03_P036" (solid, pour order 36): 90.344,17.288 90.344,15.764 86.788,15.764 86.788,16.78 86.28,17.288
6V on Layer 2 "6V_L03_P021" (solid, pour order 21): 36.496,14.748 36.496,11.192 38.02,9.668 56.308,9.668 84.756,9.668 87.804,12.716 87.804,13.732 86.788,14.748 54.276,14.748 53.768,15.256 52.752,15.256 37.004,15.256
6V on Layer 2 "6V_L03_P022" (solid, pour order 22): 66.468,42.18 66.468,44.212 67.484,45.228 71.04,45.228 93.392,22.876 93.392,14.24 88.82,9.668 84.248,9.668 84.248,14.24 86.28,14.24 86.788,14.748 90.852,14.748 91.868,15.764 91.868,18.812 76.12,34.56 74.088,34.56
6V on Layer 2 "6V_L03_P023" (solid, pour order 23): 32.432,38.624 32.432,39.64 38.02,45.228 70.532,45.228 72.564,43.196 72.564,40.656 69.008,40.656 68.5,40.148 66.976,41.672 40.052,41.672 35.48,37.1 33.956,37.1
6V on Layer 2 "6V_L03_P025" (solid, pour order 25): 82.216,66.056 84.756,66.056 87.296,63.516 91.868,58.944 91.868,40.656 83.74,32.528 78.66,32.528 77.136,34.052 78.152,35.068 78.152,35.576 87.804,45.228 87.804,57.42 81.708,63.516 81.708,65.548
12V on Layer 2 "12V_L03_P026" (solid, pour order 26): 72.564,67.072 85.264,54.372 85.264,46.752 85.264,46.244 37.512,46.244 30.4,39.132 30.4,36.592 32.432,34.56 36.496,34.56 37.004,33.544 36.496,34.56 36.496,34.052 37.004,34.052 37.004,34.56 37.004,34.052 37.004,16.78 34.972,14.748 34.972,10.684 34.464,10.684 32.94,9.16 23.796,9.16 6.016,26.94 6.016,63.516 9.572,67.072
6V on Layer 2 "6V_L03_P030" (solid, pour order 30): 54.276,14.748 53.768,15.256 53.768,27.448 54.276,27.956 55.8,27.956 56.816,26.94 56.816,14.385
6V on Layer 2 "6V_L03_P031" (solid, pour order 31): 50.72,13.732 53.768,16.78 53.768,17.288 56.816,17.288 59.864,14.24
12V on Layer 2 "12V_L03_P033" (solid, pour order 33): 34.464,33.544 35.48,33.544 38.02,36.084 67.992,36.084 85.772,18.304 89.328,18.304 90.344,17.288 90.344,15.764 60.88,15.764 58.848,17.796 58.848,27.448 55.8,30.496 54.276,30.496 52.244,28.464 52.244,18.812 49.196,15.764 33.956,15.764 33.448,16.272
GND on Layer 1 "GND_L02_P037" (solid, pour order 37): 0,0 0,80 99,80 99,0

## Silkscreen, mask and mechanical layers (free items; w line width, h text height)
Mechanical 1:
  lines w0.254: 0.2,0.171 98.842,0.171 98.842,79.8 0.2,79.8 0.2,0.171